# Altium PCB DIO_MCX_mezzanine.PCBDOC (part 2 of 2)
Units mil, origin at the board's own origin, x right, y up, seen from the top; angles counter-clockwise.
Board outline 2519.69 x 3937 mil, 4 copper layers (L1, P2, P3, L4), stack 61.85 mil thick; 119 components, 65 nets, 382 pads, 96 vias.
Unrouted connection lines stored in the file: 38.
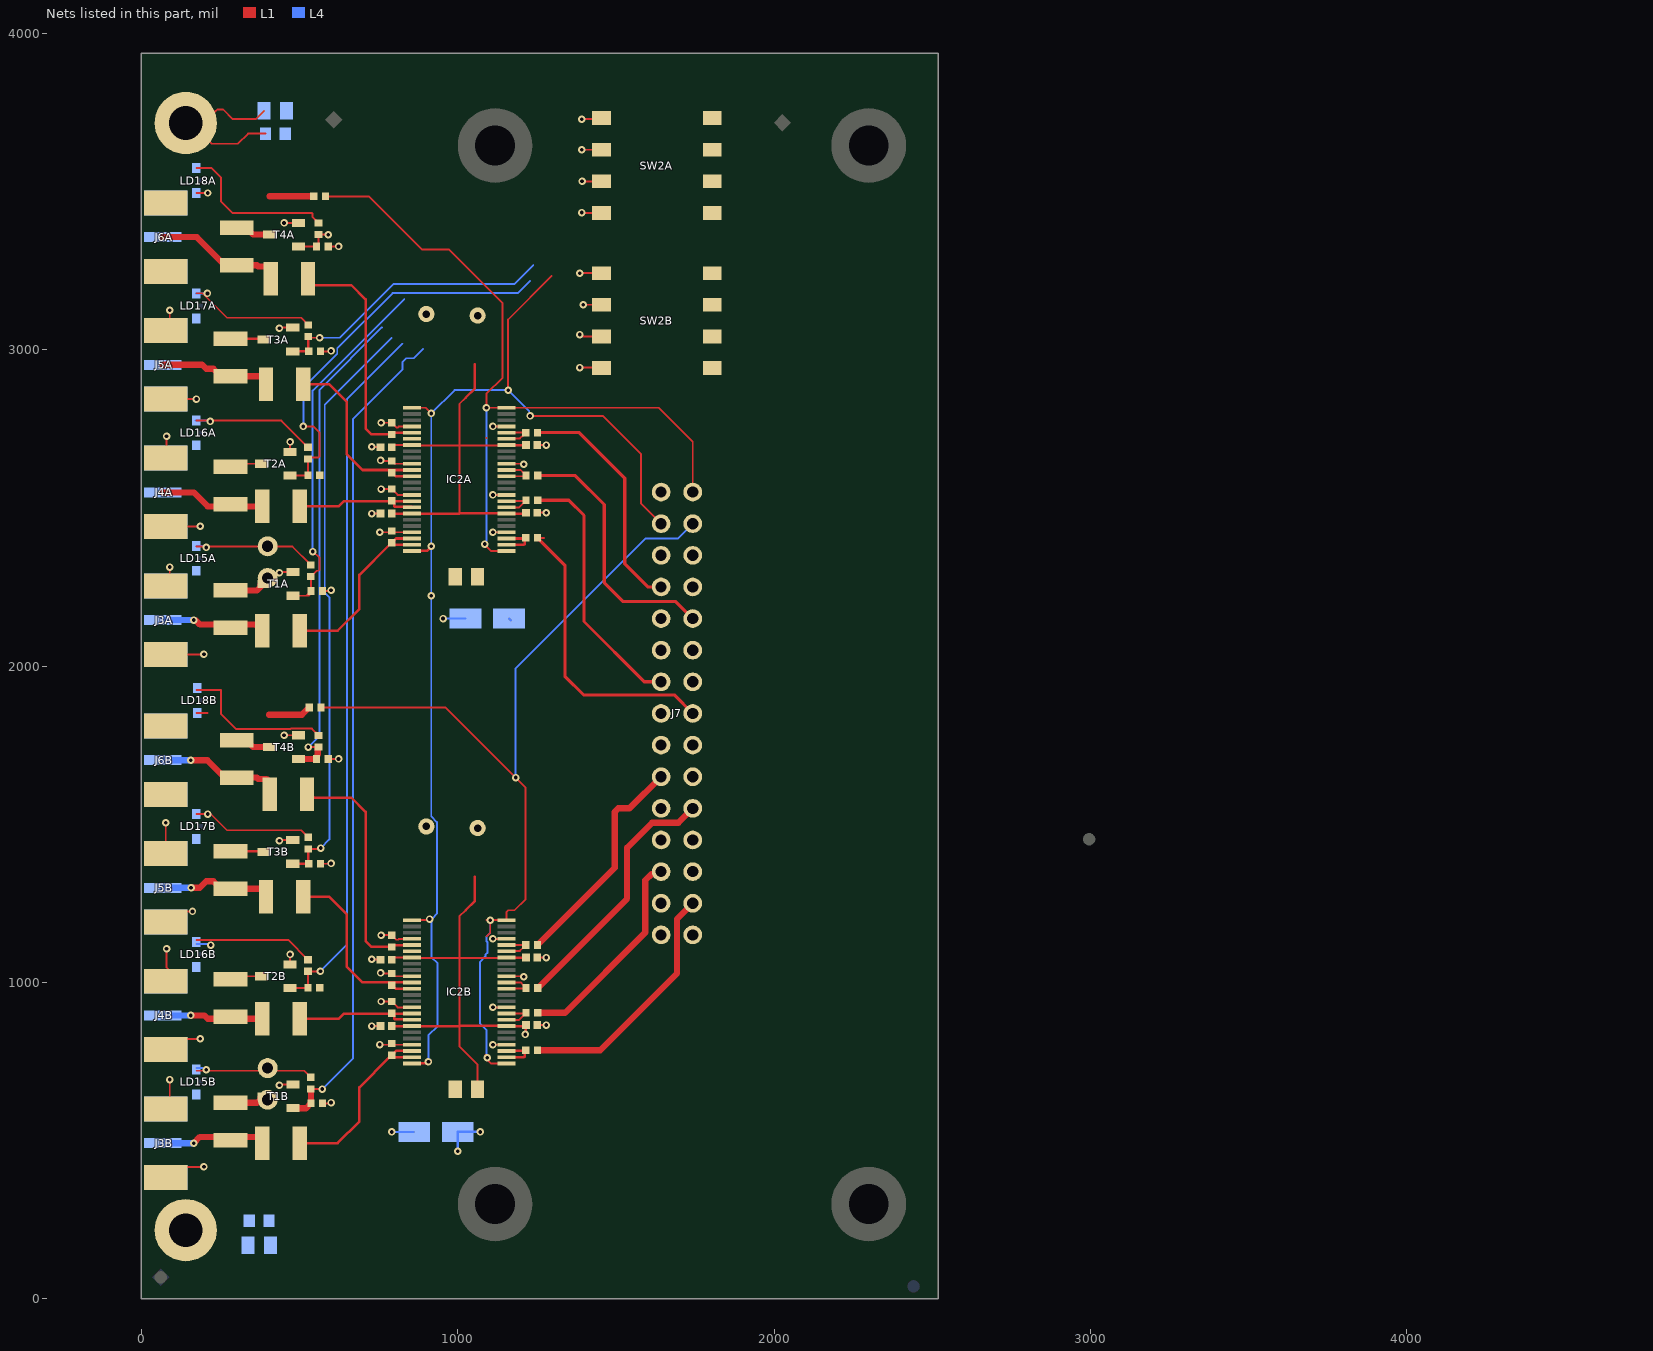
[diagram p4: the nets of this part, all layers, seen from the top]

## Via types
v1: diameter 23.62, hole 11.81, L1 to L4, 96 vias

## Nets (pads, with @x,y where several pads share a name; then routed paths per layer and width w, separated by ;. In a path a pad name is that pad's centre, name@x,y a point inside that pad or via, vN(x,y) a via of type N, cw(c..) or ccw(c..) an arc to the next point about the centre after c; other vN are vias at no path point)
DIR_CTRL2: IC2A.1 IC2A.24 J7.29 R1.2 | length 2419.3
  L1 w6: R1.2@582.05,3485.17 718.92,3485.17 886.49,3317.6 970.79,3317.6 1141.73,3146.65 1141.73,2912.4 1090.52,2861.19 v1(1090.54,2816.9) IC2A.24@1154.53,2816.93 1635.62,2816.93 1742.91,2709.64 J7.29@1742.91,2550.39 ; v1(1085.68,2385.83) 1085.68,2383.34 1104.85,2364.17 IC2A.1@1154.53,2364.17
  L4 w6: v1(1085.68,2385.83) 1085.68,2390.6 1090.54,2395.46 v1(1090.54,2816.9)
DIR_CTRL3: IC2B.1 IC2B.24 J7.27 R2.2 | length 2976.9
  L1 w6: R2.2@567.72,1869.56 961.19,1869.56 v1(1183.12,1647.64) 1214.76,1615.99 1214.76,1263.71 1179.4,1228.35 1159.45,1228.35 1154.53,1223.43 IC2B.24@1154.53,1196.85 v1(1102.79,1196.85) ; 1090.52,1196.85 v1(1102.79,1196.85) ; 1091.41,1146 1102.79,1157.38 v1(1102.79,1196.85) ; v1(1093.5,761.81) 1093.5,764.24 1087.6,770.15 1085.68,768.23 1085.68,763.26 1104.85,744.09 IC2B.1@1154.53,744.09
  L4 w6: v1(1093.5,761.81) 1091.41,763.91 1091.41,849.28 1070.74,869.95 1070.74,1065.29 1087.6,1082.15 1087.6,1087.64 1093.5,1093.55 1093.5,1127.49 1091.41,1129.59 1091.41,1146 1102.79,1157.38 v1(1102.79,1196.85) ; v1(1183.12,1647.64) 1183.12,1993.24 1592.91,2403.03 1695.55,2403.03 J7.27@1742.91,2450.39
GND: B10A.1 B10B.1 C5.2 C6.2 C12A.1 C12B.1 C48A.1 C48B.1 C49A.1 C49B.1 C50A.1 C50B.1 C51A.1 C51B.1 C52A.2 C52B.2 IC2A.4 IC2A.10 IC2A.15 IC2A.21 IC2A.28 IC2A.34 IC2A.39 IC2A.45 IC2B.4 IC2B.10 IC2B.15 IC2B.21 IC2B.28 IC2B.34 IC2B.39 IC2B.45 J3A.2 J3B.2 J4A.2 J4B.2 J5A.2 J5B.2 J6A.2 J6B.2 J7.1 J7.2 J7.4 J7.5 J7.7 J7.8 J7.10 J7.11 J7.13 J7.14 J7.16 J7.17 J7.19 J7.20 J7.22 J7.23 J7.25 LD15A.1 LD15B.1 LD16A.1 LD16B.1 LD17A.1 LD17B.1 LD18A.1 LD18B.1 R19A.1 R19B.1 R20A.1 R20B.1 R22A.1 R22B.1 R23A.1 R23B.1 R34.1 R35.1 R140A.1 R140B.1 R143A.1 R143B.1 R146A.1 R146B.1 R149A.1 R149B.1 T1A.2 T1B.2 T2A.2 T2B.2 T3A.2 T3B.2 T4A.2 T4B.2 | length 3365
  L1 w5.98: J5B.2@76.77,1224.41 v1(161.42,1224.41) ; J5B.2@76.77,1440.94 v1(76.77,1504.92) ; v1(79.51,1106.86) 79.51,1047.24 J4B.2@89.35,1037.4 ; v1(79.51,2726.94) 79.51,2667.32 J4A.2@89.35,2657.48 ; J5A.2@89.35,2844.49 v1(174,2844.49) ; J5A.2@89.35,3061.02 v1(89.35,3125) ; v1(436.34,1448.08) 438.21,1449.95 T3B.2@478.35,1449.95 ; v1(436.34,3068.16) 438.21,3070.03 T3A.2@478.35,3070.03 ; R22B.1@565.75,1375.15 598.19,1375.15 v1(599.37,1376.33) ; R22A.1@565.75,2995.23 598.19,2995.23 v1(599.37,2996.41) ; v1(728.35,862.2) C51B.1@755.51,862.2 ; v1(728.35,1073.27) 729.53,1072.09 C48B.1@755.91,1072.09 ; v1(728.35,2482.28) C51A.1@755.51,2482.28 ; v1(728.35,2693.35) 729.53,2692.17 C48A.1@755.91,2692.17 ; v1(753.54,803.54) 753.94,803.15 IC2B.45@855.31,803.15 ; v1(753.54,2423.62) 753.94,2423.23 IC2A.45@855.31,2423.23 ; v1(755.91,1030.09) 757.65,1028.35 R146B.1@791.73,1028.35 800.39,1019.69 IC2B.34@855.31,1019.69 ; v1(755.91,2650.17) 757.65,2648.43 R146A.1@791.73,2648.43 800.39,2639.76 IC2A.34@855.31,2639.76
  L1 w6: J3B.2@89.35,417.04 v1(197.62,417.04) ; J3B.2@89.35,633.58 v1(89.35,693.01) ; J4B.2@89.35,820.87 184.78,820.87 v1(185.81,821.9) ; J3A.2@89.35,2037.4 v1(197.62,2037.4) ; J3A.2@89.35,2253.94 v1(89.35,2313.37) ; J4A.2@89.35,2440.94 184.78,2440.94 v1(185.81,2441.97) ; 173.23,1852.1 209.65,1852.1 ; 173.23,3495.8 v1(209.65,3495.8) ; v1(436.34,674.78) 438.87,677.31 T1B.2@478.48,677.31 ; v1(436.34,2294.86) 438.87,2297.39 T1A.2@478.48,2297.39 ; v1(450.79,1781.1) 451.18,1781.5 T4B.2@496.06,1781.5 ; v1(450.79,3401.18) 451.18,3401.57 T4A.2@496.06,3401.57 ; T2B.2@469.8,1057.09 v1(469.8,1088.58) ; T2A.2@469.8,2677.17 v1(469.8,2708.66) ; R19B.1@572.64,617.76 596.9,617.76 v1(599.37,620.23) ; R19A.1@572.64,2237.84 596.9,2237.84 v1(599.37,2240.31) ; R23B.1@590.35,1706.69 v1(623.08,1706.69) ; R23A.1@590.35,3326.77 v1(623.08,3326.77) ; v1(757.65,939.76) R143B.1@791.34,939.76 809.84,921.26 IC2B.39@855.31,921.26 ; v1(757.65,1149.38) R149B.1@791.73,1149.38 806.23,1134.88 811.2,1134.88 814.11,1137.8 IC2B.28@855.31,1137.8 ; v1(757.65,2559.84) R143A.1@791.34,2559.84 809.84,2541.34 IC2A.39@855.31,2541.34 ; v1(757.65,2769.46) R149A.1@791.73,2769.46 806.23,2754.96 811.2,2754.96 814.11,2757.87 IC2A.28@855.31,2757.87 ; v1(1111.22,803.15) IC2B.4@1154.53,803.15 ; v1(1111.22,921.26) IC2B.10@1154.53,921.26 ; v1(1111.22,1137.8) IC2B.21@1154.53,1137.8 ; v1(1111.22,2423.23) IC2A.4@1154.53,2423.23 ; v1(1111.22,2541.34) IC2A.10@1154.53,2541.34 ; v1(1111.22,2757.87) IC2A.21@1154.53,2757.87 ; IC2B.15@1154.53,1019.69 1207.09,1019.69 v1(1209.01,1017.76) ; IC2A.15@1154.53,2639.76 1207.09,2639.76 v1(1209.01,2637.84) ; C49B.1@1250.98,865.2 v1(1279.53,865.2) ; C50B.1@1250.98,1078.74 v1(1279.53,1078.74) ; C49A.1@1250.98,2485.28 v1(1279.53,2485.28) ; C50A.1@1250.98,2698.82 v1(1279.53,2698.82)
  L4 w5.98: LD16A.1@170.98,2777.04 213.87,2777.04 v1(217.24,2773.67) ; LD17A.1@172.2,3178.44 v1(208.62,3178.44) ; LD16B.1@173.23,1121.48 216.12,1121.48 v1(219.49,1118.11) ; LD17B.1@173.23,1532.48 v1(209.65,1532.48)
  L4 w6: LD15B.1@173.23,729.11 195.03,729.11 199.96,724.19 v1(204.72,724.19) ; LD15A.1@173.23,2380.29 195.03,2380.29 199.96,2375.37 v1(204.72,2375.37) ; v1(791.45,527.56) C52B.2@862.32,527.56 ; v1(953.65,2150.39) C52A.2@1024.51,2150.39
IO0A: J6A.1 R17A.1 R148A.2 | length 411.5
  L1 w19.68: 66.93,3356.3 175.2,3356.3 263.78,3267.72 R148A.2@301.18,3267.72 365.12,3267.72 369.34,3263.5 395.63,3263.5 408.42,3250.7 R17A.1@408.42,3224.41
IO0B: J6B.1 R17B.1 R148B.2 | length 397.7
  L1 w19.68: v1(155.51,1702.76) 208.66,1702.76 263.78,1647.64 365.12,1647.64 369.34,1643.42 395.63,1643.42 408.42,1630.62 R17B.1@408.42,1604.33
  L4 w19.68: J6B.1@66.93,1702.76 v1(155.51,1702.76)
IO1A: J5A.1 R15A.1 R145A.2 | length 360.2
  L1 w19.68: 66.93,2952.76 191.86,2952.76 204.72,2939.89 227.67,2939.89 250.98,2916.58 R145A.2@281.5,2916.58 380.91,2916.58 393.7,2903.79 R15A.1@393.7,2890.68
IO1B: J5B.1 R15B.1 R145B.2 | length 363.4
  L1 w19.68: v1(156.99,1299.21) 184.13,1299.21 204.72,1319.81 227.67,1319.81 250.98,1296.5 380.91,1296.5 393.7,1283.71 R15B.1@393.7,1270.6
  L4 w19.68: J5B.1@66.93,1299.21 v1(156.99,1299.21)
IO2A: J4A.1 R14A.1 R142A.2 | length 333.3
  L1 w19.68: 66.93,2549.21 165.48,2549.21 209.73,2504.97 R14A.1@381.89,2504.97
IO2B: J4B.1 R14B.1 R142B.2 | length 319.4
  L1 w19.68: v1(155.51,895.67) 198.95,895.67 209.73,884.89 R14B.1@381.89,884.89
  L4 w19.68: J4B.1@66.93,895.67 v1(155.51,895.67)
IO3A: J3A.1 R12A.1 R139A.2 | length 328.9
  L1 w19.68: v1(165.35,2145.67) 170.98,2145.67 185.04,2131.61 362.2,2131.61 R12A.1@381.89,2111.92
  L4 w19.68: J3A.1@66.93,2145.67 v1(165.35,2145.67)
IO3B: J3B.1 R12B.1 R139B.2 | length 331.3
  L1 w19.68: v1(165.35,491.84) 185.04,511.53 362.2,511.53 R12B.1@381.89,491.84
  L4 w19.68: J3B.1@66.93,491.84 v1(165.35,491.84)
IO8: J7.24 R29A.2 | length 752
  L1 w10: R29A.2@1251.77,2738.19 1384.01,2738.19 1527.91,2594.29 1527.91,2323.13 1600.65,2250.39 J7.24@1642.91,2250.39
IO9: J7.21 R28A.2 | length 822.3
  L1 w10: R28A.2@1252.56,2602.36 1371.78,2602.36 1463,2511.14 1463,2264 1523,2204 1689.3,2204 J7.21@1742.91,2150.39
IO10: J7.18 R27A.2 | length 824.7
  L1 w10: R27A.2@1252.56,2524.26 1351.5,2524.26 1399,2476.75 1399,2141 1589.61,1950.39 J7.18@1642.91,1950.39
IO11: J7.15 R26A.2 | length 947.3
  L1 w6: R26A.2@1251.77,2405.51 1271.06,2405.51 1272.09,2404.49
  L1 w10: R26A.2@1251.77,2405.51 1338.58,2318.7 1338.58,1967.89 1397.48,1909 1684.3,1909 J7.15@1742.91,1850.39
IO12: J7.12 R29B.2 | length 715
  L1 w19.68: R29B.2@1251.77,1118.11 1496.06,1362.4 1496.06,1538.86 1507.59,1550.39 1542.91,1550.39 J7.12@1642.91,1650.39
IO13: J7.9 R28B.2 | length 820
  L1 w19.68: R28B.2@1252.56,982.28 1535.43,1265.16 1535.43,1426.18 1614.17,1504.92 1697.44,1504.92 J7.9@1742.91,1550.39
IO14: J7.6 R27B.2 | length 671.8
  L1 w19.68: R27B.2@1252.56,904.18 1339.22,904.18 1592.91,1157.87 1592.91,1322.89 1612.88,1342.86 1635.38,1342.86 J7.6@1642.91,1350.39
IO15: J7.3 R26B.2 | length 784.7
  L1 w19.68: R26B.2@1251.77,785.43 1450.33,785.43 1692.91,1028.02 1692.91,1200.39 J7.3@1742.91,1250.39
LED0A: LD15A.2 R18A.2 | length 386.2
  L1 w6: 173.23,2377.96 477.54,2377.96 R18A.2@535.43,2320.06
LED0B: LD15B.2 R18B.2 | length 370.8
  L1 w6: 173.23,720.85 514.57,720.85 R18B.2@535.43,699.98
LED1A: LD16A.2 R25A.2 | length 388.3
  L1 w6: 173.23,2776.54 442.17,2776.54 R25A.2@526.54,2692.17
LED1B: LD16B.2 R25B.2 | length 379.1
  L1 w6: 173.23,1134.42 464.21,1134.42 R25B.2@526.54,1072.09
LED2A: LD17A.2 R3A.2 | length 395.6
  L1 w5: 173.23,3178.44 193.6,3178.44 270.52,3101.53 504.82,3101.53 R3A.2@527.56,3078.79
LED2B: LD17B.2 R3B.2 | length 384.9
  L1 w5: 173.23,1532.48 219.49,1532.48 270.52,1481.45 504.82,1481.45 R3B.2@527.56,1458.71
LED3A: LD18A.2 R4A.2 | length 508.5
  L1 w6: 173.23,3574.54 221.61,3574.54 250.98,3545.17 250.98,3469.67 287.58,3433.07 537.82,3433.07 541.34,3429.56 541.34,3419.84 R4A.2@560,3401.18
LED3B: LD18B.2 R4B.2 | length 491.6
  L1 w6: 173.23,1925.09 250.98,1925.09 250.98,1849.59 299.39,1801.18 470.97,1801.18 472.08,1802.29 538.81,1802.29 R4B.2@560,1781.1
Mezz_Buf_OEn: IC2A.25 IC2A.48 IC2B.25 IC2B.48 J7.28 | length 3804.4
  L1 w6: IC2B.25@855.31,1196.85 914.48,1196.85 v1(911.02,1200.32) ; IC2A.25@855.31,2816.93 898.62,2816.93 916.34,2799.21 v1(916.34,2798.89) ; v1(907.45,748.99) v1@912.34,753.88 ; v1@912.34,2373.95 916.34,2377.96 v1(916.34,2378.82) ; v1(1159.45,2872.47) 1159.45,3095.87 1297.14,3233.56 ; v1(1228.69,2791.16) 1458.57,2791.16 1579.8,2669.93 1579.8,2513.5 J7.28@1642.91,2450.39
  L1 w8: IC2B.48@855.31,744.09 902.56,744.09 v1@912.34,753.88 ; IC2A.48@855.31,2364.17 902.56,2364.17 v1@912.34,2373.95
  L4 w6: v1(907.45,748.99) 907.45,833.38 936.15,862.08 936.15,1060.61 916.84,1079.92 916.84,1194.49 913.93,1197.4 913.93,1198.46 919.16,1203.69 920.21,1203.69 934.18,1217.66 934.18,1507.02 916.34,1524.87 v1(916.34,2222.59) v1(916.34,2378.82) v1(916.34,2798.89) 989.92,2872.47 v1(1159.45,2872.47) 1226.01,2805.91 1226.01,2793.84 v1(1228.69,2791.16)
NetB13_1: B13.1 C5.1 R34.2
NetB14_1: B14.1 C6.1 R35.2 | length 581.2
  L1 w6: 387.8,3755.43 361.56,3729.19 289.11,3729.19 258.51,3759.79 240.13,3759.79 233.86,3753.52 176.52,3753.52 B14.1@140,3717 156.1,3717 221.53,3651.57 305.12,3651.57 337.33,3683.79 391.73,3683.79
NetIC2A_2: IC2A.2 IC2A.3 R26A.1 | length 136.8
  L1 w8: IC2A.2@1154.53,2383.86 1209.01,2383.86 1211.14,2385.99 1211.14,2401.89 R26A.1@1212.8,2403.54 ; IC2A.3@1154.53,2403.54 R26A.1@1212.8,2403.54 ; R26A.1@1214.76,2405.51 R26A.1@1212.8,2403.54
NetIC2A_8: IC2A.8 IC2A.9 R27A.1 | length 132.8
  L1 w6: IC2A.8@1154.53,2501.97 1194.05,2501.97 1207.13,2515.05 1215.55,2523.47 R27A.1@1215.55,2524.26 1212.95,2521.65 IC2A.9@1154.53,2521.65
NetIC2A_13: IC2A.13 IC2A.14 R28A.1 | length 130.7
  L1 w6: IC2A.13@1154.53,2600.39 1213.58,2600.39 R28A.1@1215.55,2602.36 1215.55,2603.15 1207.13,2611.57 1198.62,2620.08 IC2A.14@1154.53,2620.08
NetIC2A_19: IC2A.19 IC2A.20 R29A.1 | length 129.1
  L1 w6: IC2A.19@1154.53,2718.5 1156.1,2720.08 1196.65,2720.08 1205.56,2728.98 1206.35,2728.98 1214.76,2737.4 R29A.1@1214.76,2738.19 IC2A.20@1154.53,2738.19
NetIC2A_29: IC2A.29 IC2A.30 R17A.2 R149A.2 | length 774.2
  L1 w8: R17A.2@526.54,3224.41 546.22,3204.72 663.35,3204.72 708.66,3159.42 708.66,2750.96 727.17,2732.45 R149A.2@791.73,2732.45 797.47,2738.19 IC2A.29@855.31,2738.19
NetIC2A_35: IC2A.35 IC2A.36 R15A.2 R146A.2 | length 620.8
  L1 w8: R15A.2@511.81,2890.68 593.97,2890.68 649.61,2835.04 649.61,2669.29 698.82,2620.08 IC2A.35@855.31,2620.08 ; R146A.2@791.73,2611.42 792.52,2611.42 803.54,2600.39 IC2A.36@855.31,2600.39
NetIC2A_40: IC2A.40 IC2A.41 R14A.2 R143A.2 | length 440.6
  L1 w8: R14A.2@500,2504.97 623.08,2504.97 639.76,2521.65 R143A.2@793.31,2521.65 ; R143A.2@791.34,2522.83 792.13,2522.83 R143A.2@793.31,2521.65 ; IC2A.41@855.31,2501.97 853.8,2503.49 801.57,2503.49 799.54,2505.51 799.54,2515.42 R143A.2@793.31,2521.65 ; IC2A.40@855.31,2521.65 R143A.2@793.31,2521.65
NetIC2A_46: IC2A.46 IC2A.47 R12A.2 R140A.2 | length 600.7
  L1 w8: R12A.2@500,2111.92 620.47,2111.92 688.98,2180.43 688.98,2288.13 784.7,2383.86 IC2A.47@855.31,2383.86 ; R140A.2@791.73,2390.1 792.52,2390.1 799.94,2397.52 799.94,2398.31 805.17,2403.54 IC2A.46@855.31,2403.54
NetIC2B_2: IC2B.2 IC2B.3 R26B.1 | length 136.8
  L1 w8: IC2B.2@1154.53,763.78 1209.01,763.78 1211.14,765.91 1211.14,781.81 R26B.1@1212.8,783.46 ; IC2B.3@1154.53,783.46 R26B.1@1212.8,783.46 ; R26B.1@1214.76,785.43 R26B.1@1212.8,783.46
NetIC2B_8: IC2B.8 IC2B.9 R27B.1 | length 132.8
  L1 w6: IC2B.8@1154.53,881.89 1194.05,881.89 1207.13,894.97 1215.55,903.39 R27B.1@1215.55,904.18 1212.95,901.57 IC2B.9@1154.53,901.57
NetIC2B_13: IC2B.13 IC2B.14 R28B.1 | length 130.7
  L1 w6: IC2B.13@1154.53,980.32 1213.58,980.32 R28B.1@1215.55,982.28 1215.55,983.07 1207.13,991.49 1198.62,1000 IC2B.14@1154.53,1000
NetIC2B_19: IC2B.19 IC2B.20 R29B.1 | length 129.1
  L1 w6: IC2B.19@1154.53,1098.43 1156.1,1100 1196.65,1100 1205.56,1108.91 1206.35,1108.91 1214.76,1117.32 R29B.1@1214.76,1118.11 IC2B.20@1154.53,1118.11
NetIC2B_29: IC2B.29 IC2B.30 R17B.2 R149B.2 | length 774.2
  L1 w8: R17B.2@526.54,1604.33 546.22,1584.65 663.35,1584.65 708.66,1539.34 708.66,1130.88 727.17,1112.38 R149B.2@791.73,1112.38 797.47,1118.11 IC2B.29@855.31,1118.11
NetIC2B_35: IC2B.35 IC2B.36 R15B.2 R146B.2 | length 620.8
  L1 w8: R15B.2@511.81,1270.6 593.97,1270.6 649.61,1214.96 649.61,1049.21 698.82,1000 IC2B.35@855.31,1000 ; R146B.2@791.73,991.34 792.52,991.34 803.54,980.32 IC2B.36@855.31,980.32
NetIC2B_40: IC2B.40 IC2B.41 R14B.2 R143B.2 | length 440.6
  L1 w8: R14B.2@500,884.89 623.08,884.89 639.76,901.57 R143B.2@793.31,901.57 ; R143B.2@791.34,902.76 792.13,902.76 R143B.2@793.31,901.57 ; IC2B.41@855.31,881.89 853.8,883.41 801.57,883.41 799.54,885.43 799.54,895.34 R143B.2@793.31,901.57 ; IC2B.40@855.31,901.57 R143B.2@793.31,901.57
NetIC2B_46: IC2B.46 IC2B.47 R12B.2 R140B.2 | length 600.7
  L1 w8: R12B.2@500,491.84 620.47,491.84 688.98,560.35 688.98,668.05 784.7,763.78 IC2B.47@855.31,763.78 ; R140B.2@791.73,770.02 792.52,770.02 799.94,777.44 799.94,778.23 805.17,783.46 IC2B.46@855.31,783.46
NetLD1_1: LD1.1 R2.1 | length 137.1
  L1 w19.68: 403.27,1846.33 507.48,1846.33 R2.1@530.71,1869.56
NetLD2_1: LD2.1 R1.1 | length 140.2
  L1 w19.68: 404.84,3485.17 R1.1@545.04,3485.17
NetR139A_1: R139A.1 T1A.3 | length 118.5
  L1 w19.68: R139A.1@281.5,2239.48 365.57,2239.48 377.1,2251.01 377.1,2257.04 380.05,2259.99 T1A.3@387.92,2259.99
NetR139B_1: R139B.1 T1B.3 | length 118.5
  L1 w19.68: R139B.1@281.5,619.4 365.57,619.4 377.1,630.94 377.1,636.96 380.05,639.91 T1B.3@387.92,639.91
NetR142A_1: R142A.1 T2A.3 | length 101.8
  L1 w6: R142A.1@281.5,2629.92 291.34,2639.76 T2A.3@379.25,2639.76
NetR142B_1: R142B.1 T2B.3 | length 101.8
  L1 w6: R142B.1@281.5,1009.84 291.34,1019.69 T2B.3@379.25,1019.68
NetR145A_1: R145A.1 T3A.3 | length 107.2
  L1 w8: R145A.1@281.5,3034.69 385.73,3034.69 T3A.3@387.8,3032.63
NetR145B_1: R145B.1 T3B.3 | length 107.2
  L1 w8: R145B.1@281.5,1414.61 385.73,1414.61 T3B.3@387.8,1412.55
NetR148A_1: R148A.1 T4A.3 | length 113.3
  L1 w19.68: R148A.1@301.18,3385.83 331.69,3385.83 353.35,3364.17 T4A.3@405.51,3364.17
NetR148B_1: R148B.1 T4B.3 | length 113.3
  L1 w19.68: R148B.1@301.18,1765.75 331.69,1765.75 353.35,1744.09 T4B.3@405.51,1744.09
P3V3: B9A.1 B9B.1 C12A.2 C12B.2 C48A.2 C48B.2 C49A.2 C49B.2 C50A.2 C50B.2 C51A.2 C51B.2 C52A.1 C52B.1 IC2A.7 IC2A.18 IC2A.31 IC2A.42 IC2B.7 IC2B.18 IC2B.31 IC2B.42 J7.26 J7.30 LD1.2 LD2.2 SW2A.1 SW2A.2 SW2A.3 SW2A.4 SW2B.1 SW2B.2 SW2B.3 SW2B.4 | length 3089.6
  L1 w5.98: C48B.2@791.34,1072.09 797.99,1078.74 IC2B.31@855.31,1078.74 857.01,1077.05 1004.92,1077.05 1152.83,1077.05 IC2B.18@1154.53,1078.74 ; C48A.2@791.34,2692.17 797.99,2698.82 IC2A.31@855.31,2698.82 857.01,2697.13 1004.92,2697.13 1152.83,2697.13 IC2A.18@1154.53,2698.82
  L1 w6: 1003.8,861.08 1004.92,862.2 ; 1003.8,2481.16 1004.92,2482.28 1004.92,2697.13 1004.92,2828.74 1024.61,2848.43 ; 1024.61,1228.35 1004.92,1208.66 1004.92,1077.05 1004.92,862.2 ; C12B.2@1062.99,662.97 1062.99,740.16 1004.92,798.23 1004.92,862.2
  L1 w8: C51B.2@790.94,862.2 IC2B.42@855.31,862.2 856.44,861.08 1003.8,861.08 ; C51A.2@790.94,2482.28 IC2A.42@855.31,2482.28 856.44,2481.16 1003.8,2481.16 ; 1004.92,862.2 1006.05,863.33 1153.4,863.33 IC2B.7@1154.53,862.2 1212.55,862.2 C49B.2@1215.55,865.2 1215.55,862.2 1215.55,837.64 v1(1213.58,835.68) ; 1004.92,2482.28 1006.05,2483.41 1153.4,2483.41 IC2A.7@1154.53,2482.28 1212.55,2482.28 C49A.2@1215.55,2485.28 ; 1024.61,1228.35 1054.13,1257.87 1054.13,1333.59 ; 1024.61,2848.43 1054.13,2877.95 1054.13,2953.67 ; IC2B.18@1154.53,1078.74 C50B.2@1215.55,1078.74 ; IC2A.18@1154.53,2698.82 C50A.2@1215.55,2698.82
  L4 w8: v1(1000.11,466.53) C52B.1@1000.11,527.56 v1(1070.98,527.56) ; C52A.1@1162.31,2150.39 C52A.1@1168.21,2144.49
TERM_IO0A: R18A.1 R19A.2 SW2A.8 T1A.1 | length 1220.3
  L1 w6: T1A.1@478.48,2222.59 520.38,2222.59 ; R19A.2@535.43,2236.86 535.43,2228.98 529.04,2222.59 520.38,2222.59 ; R19A.2@535.63,2237.84 R19A.2@535.43,2237.64 ; v1(541.34,2362.2) 543.77,2362.2 562.99,2342.98 562.99,2305.07 559.48,2301.55 553.94,2301.55 R18A.1@535.43,2283.05 R19A.2@535.43,2237.64 ; v1(1391.61,3434.05) 1392.99,3432.68 SW2A.8@1454.6,3432.68 ; 520.38,2222.59 R19A.2@535.43,2237.64
  L4 w6: v1(541.34,2362.2) 541.34,2870.99 830.78,3160.43
TERM_IO0B: R18B.1 R19B.2 SW2B.8 T1B.1 | length 2699.4
  L1 w6: R18B.1@535.43,662.97 v1(571.33,662.97) ; v1(1385.7,2944.07) 1452.9,2944.07 SW2B.8@1454.6,2942.37
  L1 w19.68: T1B.1@478.48,602.51 520.38,602.51 R19B.2@535.63,617.76 535.63,662.78 R18B.1@535.43,662.97
  L4 w6: v1(571.33,662.97) 669.29,760.93 669.29,2781.49 825.66,2937.86 825.66,2961.88 837.27,2973.48 861.28,2973.48 889.89,3002.09
TERM_IO1A: R20A.2 R25A.1 SW2A.7 T2A.1 | length 1333.7
  L1 w6: T2A.1@469.8,2602.36 525.62,2602.36 R20A.2@526.54,2603.28 R25A.1@526.54,2655.16 530.82,2659.45 559.48,2659.45 562.99,2662.96 562.99,2737.67 542.79,2757.87 v1(511.81,2757.87) ; v1(1392.99,3532.68) SW2A.7@1454.6,3532.68
  L4 w6: v1(511.81,2757.87) 511.81,2880.83 619.18,2988.2 619.18,3004.24 794.07,3179.13 1189.32,3179.13 1228.69,3218.5
TERM_IO1B: R20B.2 R25B.1 SW2B.7 T2B.1 | length 2311.1
  L1 w6: T2B.1@469.8,982.28 525.62,982.28 R20B.2@526.54,983.2 R25B.1@526.54,1035.08 v1(565.75,1035.08) ; v1(1385.7,3048.26) 1390.47,3048.26 1396.37,3042.37 SW2B.7@1454.6,3042.37
  L4 w6: v1(565.75,1035.08) 649.61,1118.94 649.61,2843.43 825.27,3019.09
TERM_IO2A: R3A.1 R22A.2 SW2A.6 T3A.1 | length 967.9
  L1 w6: R3A.1@527.56,3041.78 531.02,3038.32 v1(562.99,3038.32) ; v1(1391.61,3632.68) SW2A.6@1454.6,3632.68
  L1 w8: T3A.1@478.35,2995.23 R22A.2@528.74,2995.23 527.56,2996.41 R3A.1@527.56,3041.78
  L4 w6: v1(562.99,3038.32) 626.9,3038.32 797.24,3208.66 1179.48,3208.66 1238.54,3267.72
TERM_IO2B: R3B.1 R22B.2 SW2B.6 T3B.1 | length 1914.4
  L1 w6: R3B.1@527.56,1421.7 563.39,1421.7 v1(566.62,1424.92) ; v1(1396.37,3142.37) SW2B.6@1454.6,3142.37
  L1 w8: T3B.1@478.35,1375.15 R22B.2@528.74,1375.15 527.56,1376.33 R3B.1@527.56,1421.7
  L4 w6: v1(566.62,1424.92) 593.97,1452.27 593.97,2217.69 579.56,2232.1 579.56,2826.61 791.27,3038.32
TERM_IO3A: R4A.1 R23A.2 SW2A.5 T4A.1 | length 192.2
  L1 w6: T4A.1@496.06,3326.77 R23A.2@553.35,3326.77 560,3333.43 R4A.1@560,3364.17 v1(590.35,3364.17) ; v1(1391.61,3729.33) 1451.25,3729.33 SW2A.5@1454.6,3732.68
TERM_IO3B: R4B.1 R23B.2 SW2B.5 T4B.1 | length 1621.7
  L1 w6: v1(527.56,1744.09) 559.21,1744.09 R4B.1@560,1744.09 ; v1(1385.7,3242.37) SW2B.5@1454.6,3242.37
  L1 w19.68: T4B.1@496.06,1706.69 R23B.2@553.35,1706.69 554.92,1708.27 554.92,1717.87 557.64,1720.59 557.64,1742.52 R4B.1@559.21,1744.09
  L4 w6: v1(527.56,1744.09) 562.99,1779.53 562.99,2873.42 760.43,3070.87
pads on no net: FTG1.FTG2 FTG2.FTG2 FTG17.FTG2 FTG18.1 FTG19.1 FTG20.1 IC2A.5 IC2A.6 IC2A.11 IC2A.12 IC2A.16 IC2A.17 IC2A.22 IC2A.23 IC2A.26 IC2A.27 IC2A.32 IC2A.33 IC2A.37 IC2A.38 IC2A.43 IC2A.44 IC2B.5 IC2B.6 IC2B.11 IC2B.12 IC2B.16 IC2B.17 IC2B.22 IC2B.23 IC2B.26 IC2B.27 IC2B.32 IC2B.33 IC2B.37 IC2B.38 IC2B.43 IC2B.44 LD15A.3 LD15B.3 LD16A.3 LD16B.3 LD17A.3 LD17B.3 LD18A.3 LD18B.3
copper on no net:
  other v1: 209.65,1852.1

## Polygon pours and split planes (outlines as drawn)
P3V3 on L1 "NONET_L-01_P-001" (solid, remove dead copper, pour order 2): 1027.56,2239.81 1027.56,2319.88 898.62,2448.82 898.62,2808 985.24,2894.62 985.24,3138.61 1007.06,3160.43 1124.02,3160.43 1159.45,3125 1159.45,2883.79 1111.22,2835.56 1111.22,2243.75 1095.47,2228 1039.37,2228
P3V3 on L1 "NONET_L-01_P-001" (solid, remove dead copper, pour order 0): 1027.56,619.73 1027.56,699.8 898.62,828.74 898.62,1187.92 985.24,1274.54 985.24,1518.53 1007.06,1540.35 1124.02,1540.35 1159.45,1504.92 1159.45,1263.71 1111.22,1215.48 1111.22,623.67 1095.47,607.92 1039.37,607.92
GND on P2 (split plane): 2499.59,20.1 20.1,20.1 20.1,300.2 20.1,3189.96 20.1,3622.05 20.1,3916.9 2499.59,3916.9
P3V3 on P3 (split plane): 2499.59,20.1 20.1,20.1 20.1,300.2 20.1,3189.96 20.1,3622.05 20.1,3916.9 2499.59,3916.9

## Keep-outs
L1:
  lines w10: 248.13,133.79 248.13,110.87 252.13,106.87 ; 252.13,246.79 252.13,330 ; 252.13,3604.79 252.13,3633.94 ; 252.13,3802.79 252.13,3819 ; 253.13,3683.79 253.13,3746.79
L4:
  lines w10: 252.13,106.87 252.13,330 ; 252.13,3604.79 252.13,3819
Keep-Out Layer:
  lines w8: 252.13,348.31 222.72,318.9 -5.94,318.9 -5.94,418.73 -5.94,3604.79 252.13,3604.79
  lines w10: 252.13,106.87 276.21,82.79

## Silkscreen, mask and mechanical layers (free items; w line width, h text height)
Top Overlay:
  drawing of 1202 lines, arcs and shapes, not listed
  text "G" at 337.13,3693.79 h40
  text "G" at 439.13,3525.59 h40
  text "G" at 330.71,276.32 h40
Bottom Overlay:
  drawing of 1237 lines, arcs and shapes, not listed
  text "Urukul v1.3" at 4861.82,2577.54 h59.06
Bottom Paste:
  drawing of 164 lines, arcs and shapes, not listed
Mechanical 1:
  lines w3.94: 0,3622.05 0,3622.05 ; 0,3622.05 0,3189.96 0,300.2 0,221.46 0,0 2519.69,0 2519.68,3937 0,3937 0,3622.05
Mechanical 2:
  lines w3.94: -100.16,-560.56 -100.16,4269.45
  lines w7.87: -392.76,895.67 66.93,895.67 ; -307.09,3356.3 66.93,3356.3 ; -305.12,2549.21 49.21,2549.21 ; -285.43,491.84 66.93,491.84 ; -285.43,1299.21 66.93,1299.21 ; -269.97,2145.67 49.21,2145.67 ; -255.91,1702.76 66.93,1702.76 ; -246.06,2952.76 66.93,2952.76 ; -226.38,679.14 -188,679.14 ; -226.38,1082.68 -188,1082.68 ; -226.38,1486.22 -188,1486.22 ; -226.38,1889.76 -188,1889.76 ; -226.38,2332.68 -188,2332.68 ; -226.38,2736.22 -188,2736.22 ; -226.38,3139.77 -187.99,3139.77 ; -198.82,652.56 -198.82,714.57 ; -198.82,679.14 -177.17,679.14 ; -198.82,1056.1 -198.82,1118.11 ; -198.82,1082.68 -177.17,1082.68 ; -198.82,1459.65 -198.82,1521.65 ; -198.82,1486.22 -177.17,1486.22 ; -198.82,1863.19 -198.82,1925.19 ; -198.82,1889.76 -177.17,1889.76 ; -198.82,2306.1 -198.82,2368.11 ; -198.82,2332.68 -177.17,2332.68 ; -198.82,2709.65 -198.82,2771.65 ; -198.82,2736.22 -177.17,2736.22 ; -198.82,3113.19 -198.82,3175.2 ; -198.82,3139.77 -177.17,3139.77 ; 112.44,217 150.82,217 ; 112.44,3717 150.82,3717 ; 137.8,895.67 176.18,895.67 ; 137.8,1299.21 176.18,1299.21 ; 137.8,1702.76 176.18,1702.76 ; 137.8,2145.67 176.18,2145.67 ; 137.8,2549.21 176.18,2549.21 ; 137.8,2952.76 176.18,2952.76 ; 137.8,3356.3 176.18,3356.3 ; 138.08,492.13 176.46,492.13 ; 140,190.42 140,252.43 ; 140,217 161.65,217 ; 140,3690.42 140,3752.43 ; 140,3717 161.65,3717 ; 165.35,869.09 165.35,931.1 ; 165.35,895.67 187.01,895.67 ; 165.35,1272.64 165.35,1334.64 ; 165.35,1299.21 187.01,1299.21 187,1299.21 ; 165.35,1676.18 165.35,1738.19 ; 165.35,1702.76 187.01,1702.76 ; 165.35,2119.09 165.35,2181.1 ; 165.35,2145.67 187.01,2145.67 ; 165.35,2522.64 165.35,2584.64 ; 165.35,2549.21 187.01,2549.21 187,2549.21 ; 165.35,2926.18 165.35,2988.19 ; 165.35,2952.76 187.01,2952.76 ; 165.35,3329.72 165.35,3391.73 ; 165.35,3356.3 187.01,3356.3 ; 165.64,465.55 165.64,527.56 ; 165.63,492.13 187.29,492.13 ; 1064.41,890.31 1102.79,890.31 ; 1091.96,863.74 1091.96,925.74 ; 1091.96,890.31 1113.61,890.31 ; -177.17,679.13 -177.17,679.14 ; -177.17,1082.68 -177.17,1082.68 ; -177.17,1486.22 -177.17,1486.22 ; -177.17,1889.76 -177.17,1889.76 ; -177.17,2332.68 -177.17,2332.68 ; -177.17,2736.22 -177.17,2736.22 ; -177.17,3139.76 -177.17,3139.77 ; 161.65,217 161.65,217 ; 161.65,3717 161.65,3717 ; 187,895.67 187.01,895.67 ; 187,1702.75 187.01,1702.76 ; 187,2145.67 187.01,2145.67 ; 187,2952.75 187.01,2952.76 ; 187,3356.3 187.01,3356.3 ; 187.28,492.12 187.29,492.13 ; 1113.61,890.31 1113.61,890.31
Mechanical 13:
  lines w7.87: -198.82,-561.02 -198.82,3867.13

## Text inside footprints (layer, text, board x,y; h text height)
J7: Mechanical 14 "30" at 1527.91,2515.39 h47.24 r270; Bottom Overlay "30" at 1527.91,2515.39 h47.24 r270
SW2A: Top Overlay "4" at 1734.8,3717.68 h39.37 r90; Top Overlay "3" at 1734.8,3617.68 h39.37 r90; Top Overlay "ON" at 1559.8,3397.68 h39.37 r90; Top Overlay "2" at 1734.8,3517.68 h39.37 r90; Top Overlay "1" at 1734.8,3427.68 h39.37 r90; Mechanical 14 "4" at 1734.8,3717.68 h39.37 r90; Mechanical 14 "3" at 1734.8,3617.68 h39.37 r90; Mechanical 14 "ON" at 1559.8,3397.68 h39.37 r90; Mechanical 14 "2" at 1734.8,3517.68 h39.37 r90; Mechanical 14 "1" at 1734.8,3427.68 h39.37 r90
SW2B: Top Overlay "4" at 1734.8,3227.37 h39.37 r90; Top Overlay "3" at 1734.8,3127.37 h39.37 r90; Top Overlay "ON" at 1559.8,2907.37 h39.37 r90; Top Overlay "2" at 1734.8,3027.37 h39.37 r90; Top Overlay "1" at 1734.8,2937.37 h39.37 r90; Mechanical 14 "4" at 1734.8,3227.37 h39.37 r90; Mechanical 14 "3" at 1734.8,3127.37 h39.37 r90; Mechanical 14 "ON" at 1559.8,2907.37 h39.37 r90; Mechanical 14 "2" at 1734.8,3027.37 h39.37 r90; Mechanical 14 "1" at 1734.8,2937.37 h39.37 r90